# Altium PCB F407I.PcbDoc (part 1 of 2)
Units mm, origin at the board's own origin, x right, y up, seen from the top; angles counter-clockwise.
Board outline 140 x 100 mm, 2 copper layers (Top Layer, Bottom Layer); 101 components, 174 nets, 604 pads, 1189 vias.
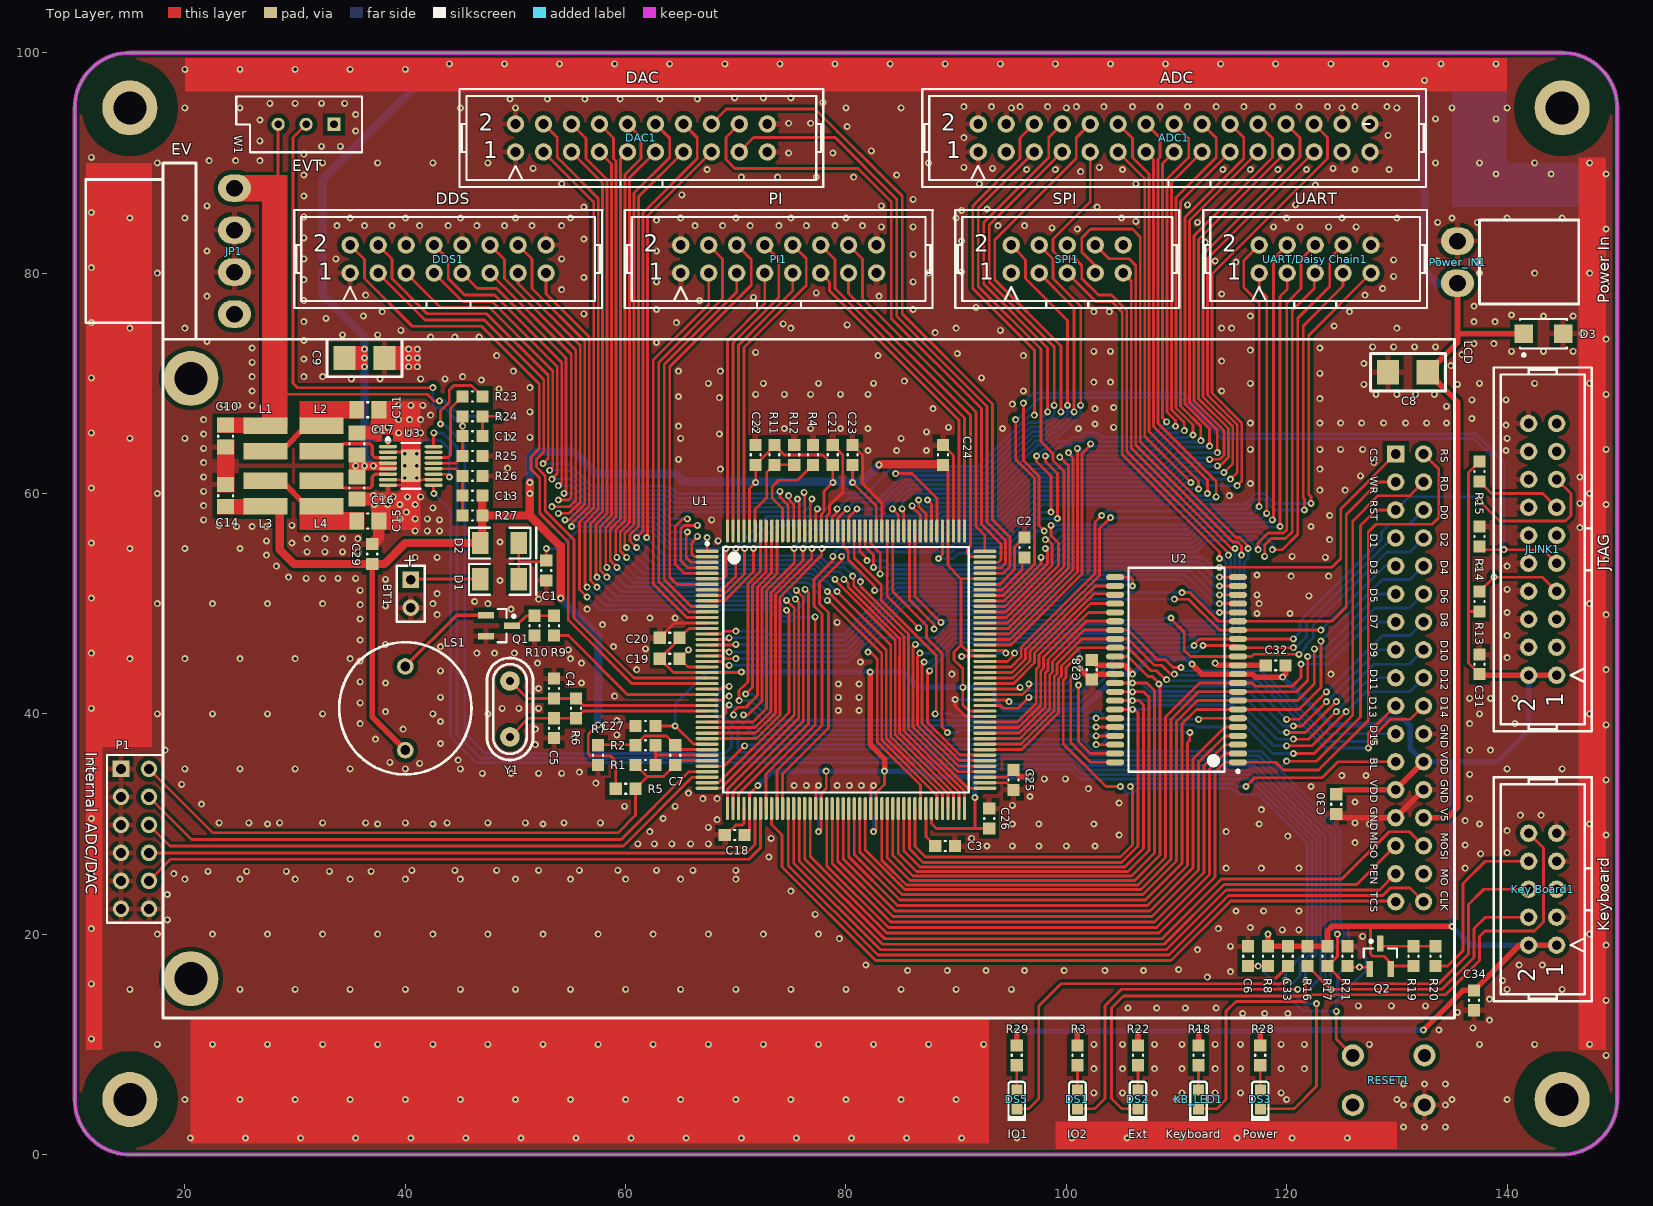
[diagram p0: Top Layer view]
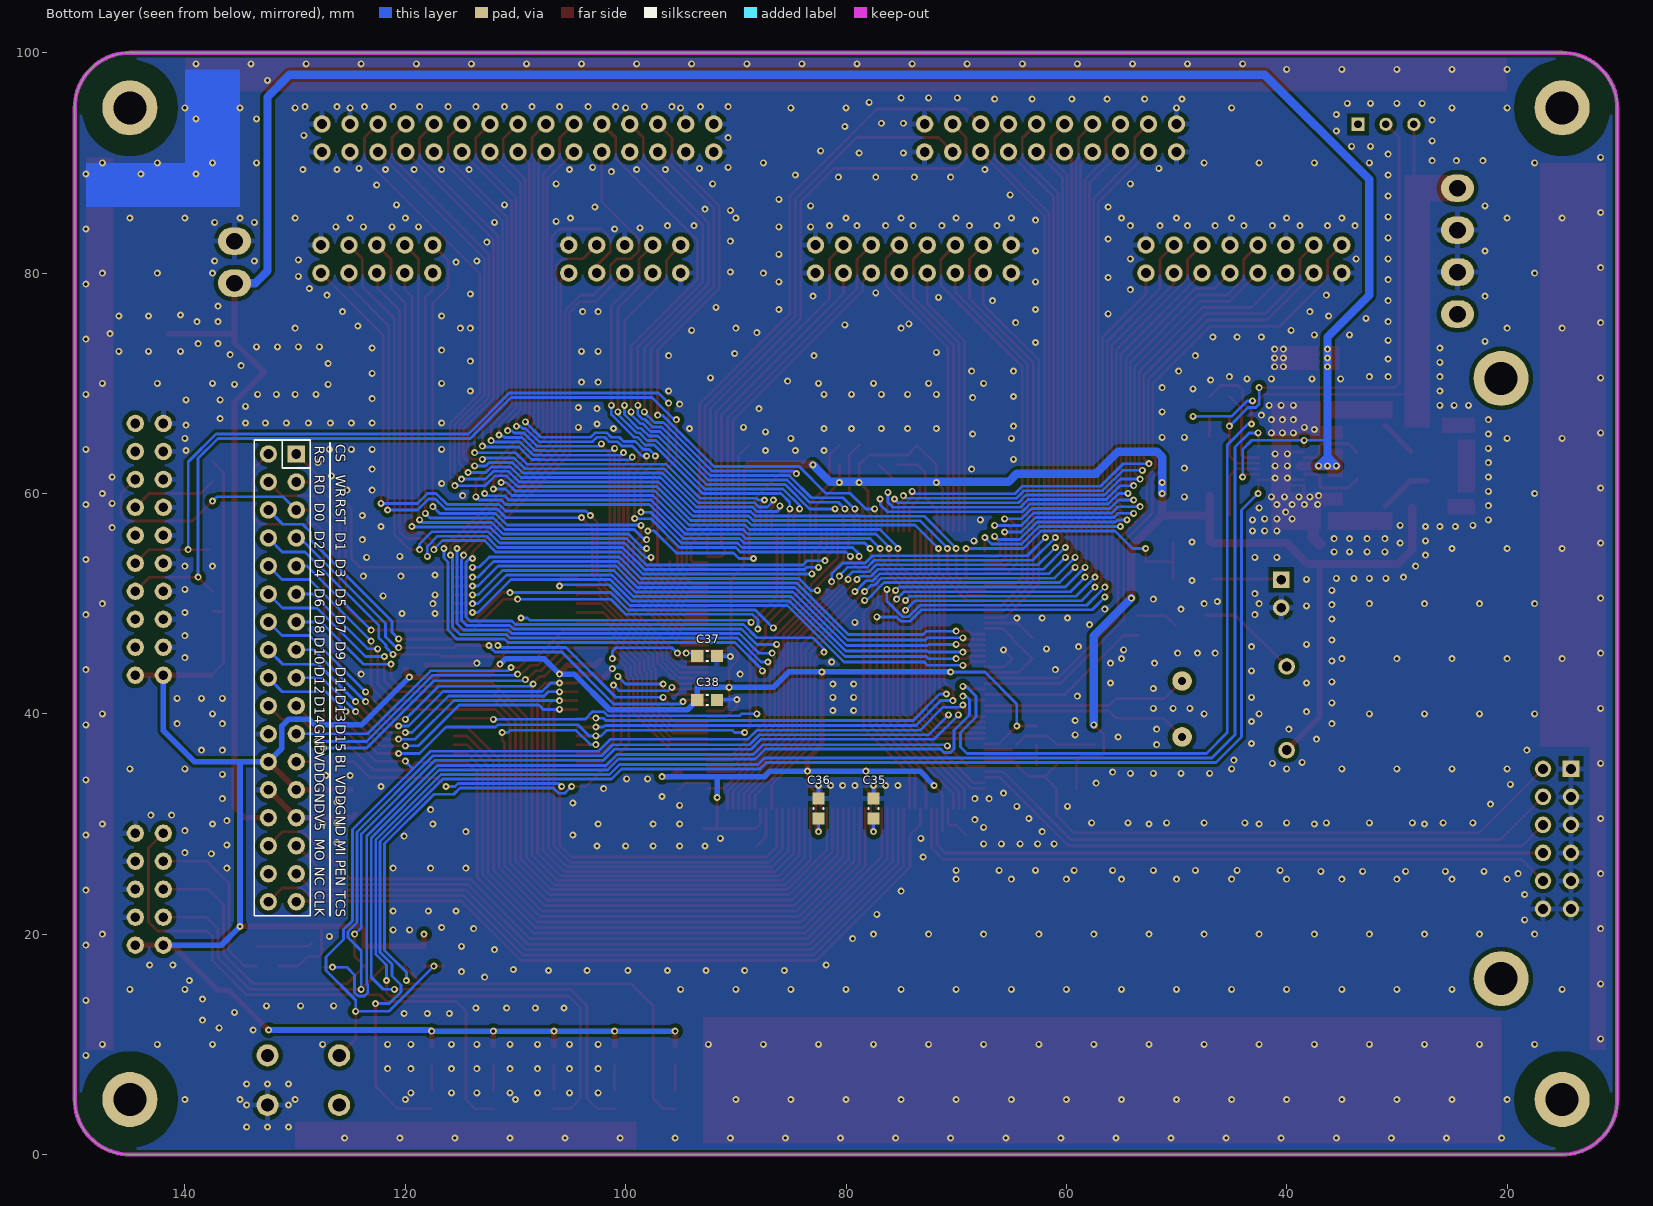
[diagram p1: Bottom Layer view, seen from below]

## Layer stack, top to bottom
Top Solder: solder mask 0.0102, Solder Resist, Dk 3.5
Top Layer: signal copper 0.0356
Dielectric 1: dielectric 0.32, FR-4, Dk 4.8
Bottom Layer: signal copper 0.0356
Bottom Solder: solder mask 0.0102, Solder Resist, Dk 3.5

## Board outline
10,5 ccw(c15,5) 15,0 145,0 ccw(c145,5) 150,5 150,95 ccw(c145,95) 145,100 15,100 ccw(c15,95) 10,95

## Design rules (kind name [scope] priority, off if disabled: settings)
Clearance [All] p1: gap=0.152 except(0.254: Track-Poly Fill-Poly; 0.381: Arc-Poly SMDPad-Poly THPad-Poly Via-Poly Poly-Poly)
HoleSize [All] p1: absolutevalues=TRUE maxlimit=2539.975 minlimit=0.305 maxpercent=80.000 minpercent=20.000
PolygonConnect PolygonConnect_1 [IsVia] p1: connectstyle=Direct reliefconductorwidth=0.254 reliefentries=4 polygonreliefangle="90 Angle" airgapwidth=0.254
PolygonConnect [All] p2: connectstyle=Relief reliefconductorwidth=0.508 reliefentries=4 polygonreliefangle="90 Angle" airgapwidth=0.381
RoutingVias [All] p1: holewidth=0.635 width=0.305 viastyle="Through Hole" minholewidth=0.305 minwidth=0.635 maxholewidth=711.2 maxwidth=1270
SilkToSilkClearance [All] p1: silktosilkclearance=0.152
SilkToSolderMaskClearance [IsPad] p1: minsilkscreentomaskgap=0.076 clearancetoexposedcopper=TRUE
SolderMaskExpansion [All] p1: expansion=0.102
Width [All] p1: maxlimit=254 minlimit=0.152 preferedwidth=0.254
27 further rules are at their usual default settings.

## Classes and differential pairs
component class PORTS: ADC1 DAC1 DDS1 JLINK1 KB_LED1 "Key Board1" PI1 Q2 R13 R14 R15 R16 R17 R18 R19 R20 R21 SPI1 "UART/Daisy Chain1"
component class Power: C8 C9 C10 C11 C12 C13 C14 C15 C16 C17 C18 C19 C20 C21 C22 C23 C24 C25 C26 C27 C28 C29 C30 C31 C32 C33 C34 C35 C36 C37 C38 D3 DS2 DS3 JP1 L1 L2 L3 L4 Power_IN1 R22 R23 R24 R25 R26 R27 R28 U3 W1
component class STM32: BT1 C1 C2 C3 C4 C5 C6 C7 D1 D2 DS1 DS5 LCD LS1 P1 Q1 R1 R2 R3 R4 R5 R6 R7 R8 R9 R10 R11 R12 R29 RESET1 U1 U2 Y1

## Components (designator, comment, footprint, x,y, rotation, side; value= is the part's Value field where it differs from the comment)
ADC1 "Header 15X2" HEADER15X2 92,91 r0 top
BT1 "3V" BAT-2 40.5,50.9 r270 top
C1 "100nF" CAPC0603(1608)55_M 52.8,53 r270 top
C2 "2.2uF" CAPC0603(1608)55_M 96.2,55.1 r270 top
C3 "2.2uF" CAPC0603(1608)55_M 89,28 r180 top
C4 "33pF" CAPC0603(1608)55_M 53.5,42.3 r90 top
C5 "33pF" CAPC0603(1608)55_M 53.5,38.7 r270 top
C6 "100nF" CAPC0603(1608)55_M 116.5,18 r90 top
C7 "100nF" CAPC0603(1608)55_M 64.5,36.25 r90 top
C8 "100uF" CAPC3225 131,71 r0 top
C9 "100uF" CAPC3225 36.3,72.3 r180 top
C10 "10uF" CAPC0805(2012)75_M 23.7,65.2 r270 top
C11 "10uF" CAPC0805(2012)75_M 36.6,67.6 r0 top
C12 "33pF" CAPC0603(1608)55_M 46.1,65.2 r0 top
C13 "33pF" CAPC0603(1608)55_M 46.1,59.8 r0 top
C14 "10uF" CAPC0805(2012)75_M 23.7,59.8 r90 top
C15 "10uF" CAPC0805(2012)75_M 36.6,57.5 r0 top
C16 "10uF" CAPC0805(2012)75_M 35.6,60.5 r90 top
C17 "10uF" CAPC0805(2012)75_M 35.6,64.5 r270 top
C18 "100nF" CAPC0603(1608)55_M 69.9,29 r0 top
C19 "100nF" CAPC0603(1608)55_M 64,45 r180 top
C20 "100nF" CAPC0603(1608)55_M 64,46.9 r0 top
C21 "100nF" CAPC0603(1608)55_M 78.8,63.5 r270 top
C22 "100nF" CAPC0603(1608)55_M 71.8,63.5 r270 top
C23 "100nF" CAPC0603(1608)55_M 80.6,63.5 r270 top
C24 "100nF" CAPC0603(1608)55_M 88.8,63.5 r270 top
C25 "100nF" CAPC0603(1608)55_M 95.2,34 r90 top
C26 "100nF" CAPC0603(1608)55_M 93,30.5 r270 top
C27 "100nF" CAPC0603(1608)55_M 61.8,38.9 r0 top
C28 "100nF" CAPC0603(1608)55_M 102.3,44 r90 top
C29 "100nF" CAPC0603(1608)55_M 37,54.5 r270 top
C30 "100nF" CAPC0603(1608)55_M 124.5,31.8 r90 top
C31 "100nF" CAPC0603(1608)55_M 137.5,44.5 r270 top
C32 "100nF" CAPC0603(1608)55_M 119,44.4 r0 top
C33 "100nF" CAPC0603(1608)55_M 120.1,18 r90 top
C34 "100nF" CAPC0603(1608)55_M 137,14 r90 top
C35 "100nF" CAPC0603(1608)55_M 77.5,31.4 r270 bottom
C36 "100nF" CAPC0603(1608)55_M 82.5,31.4 r270 bottom
C37 "100nF" CAPC0603(1608)55_M 92.6,45.25 r0 bottom
C38 "100nF" CAPC0603(1608)55_M 92.6,41.25 r0 bottom
D1 "1N4148" LL34 50.3,52.2 r270 top
D2 "1N4148" LL34 50.3,55.5 r270 top
D3 "P6KE6.8A" DO-214AC 143.3,74.5 r180 top
DAC1 "Header 10X2" HEADER10X2 50,91 r0 top
DDS1 "Header 8X2" Header8X2 35,80 r0 top
DS1 "LED-BLUE" 0603LED_BLUE_V 101,5 r90 top
DS2 "LED-BLUE" 0603LED_BLUE_V 106.5,5 r90 top
DS3 "LED-BLUE" 0603LED_BLUE_V 117.6,5 r90 top
DS5 "LED-BLUE" 0603LED_BLUE_V 95.5,5 r90 top
JLINK1 "Header 10X2" HEADER10X2 144.5,43.5 r90 top
JP1 "Header 4" 3.96-4-A 24.5,82 r270 top
KB_LED1 "LED-BLUE" 0603LED_BLUE_V 112,5 r90 top
"Key Board1" "JTAG" HEADER5X2 144.5,19 r90 top
L1 "4.7uH" CD32 27.3,65 r0 top
L2 "4.7uH" CD32 32.4,65 r0 top
L3 "4.7uH" CD32 27.3,60 r180 top
L4 "4.7uH" CD32 32.4,60 r180 top
LCD "TFT_LCD4.7" DB2*17-3.5 18,74 r270 top locked
LS1 "Speaker" Buzzer 40,40.5 r90 top
P1 "Header 6X2" HDR2X6 14.2,35 r270 top
PI1 "Header 8X2" HEADER8X2 65,80 r0 top locked
Power_IN1 "Header 2" VH3.96-2-AW 135.5,81 r270 top
Q1 "MMBT3904" SOT23_M 48.5,48 r0 top
Q2 "MMBT3906" SOT23_M 128.5,18 r90 top
R1 "0R" RESC0603(1608)_M 61.8,35.35 r0 top
R2 "Open" RESC0603(1608)_M 61.8,37.15 r0 top
R3 "1K" RESC0603(1608)_M 101,9 r90 top
R4 "10K" RESC0603(1608)_M 77,63.5 r270 top
R5 "10R" RESC0603(1608)_M 60,33.2 r180 top
R6 "1M" RESC0603(1608)_M 55.5,40.5 r90 top
R7 "0R" RESC0603(1608)_M 57.5,36.25 r90 top
R8 "10K" RESC0603(1608)_M 118.3,18 r270 top
R9 "1K" RESC0603(1608)_M 53.5,48 r270 top
R10 "10K" RESC0603(1608)_M 51.725,48 r90 top
R11 "20K" RESC0603(1608)_M 73.5,63.5 r270 top
R12 "30K" RESC0603(1608)_M 75.3,63.5 r270 top
R13 "1K" RESC0603(1608)_M 137.5,50.2 r270 top
R14 "1K" RESC0603(1608)_M 137.5,56.1 r90 top
R15 "1K" RESC0603(1608)_M 137.5,62 r90 top
R16 "10K" RESC0603(1608)_M 121.9,18 r270 top
R17 "10K" RESC0603(1608)_M 123.7,18 r270 top
R18 "1K" RESC0603(1608)_M 112,9 r270 top
R19 "10K" RESC0603(1608)_M 131.5,18 r270 top
R20 "1K" RESC0603(1608)_M 133.5,18 r270 top
R21 "10K" RESC0603(1608)_M 125.5,18 r270 top
R22 "470R" RESC0603(1608)_M 106.5,9 r270 top
R23 "1K" RESC0603(1608)_M 46.1,68.8 r180 top
R24 "680K" RESC0603(1608)_M 46.1,67 r180 top
R25 "150K" RESC0603(1608)_M 46.1,63.4 r180 top
R26 "150K" RESC0603(1608)_M 46.1,61.6 r180 top
R27 "680K" RESC0603(1608)_M 46.1,58 r180 top
R28 "470R" RESC0603(1608)_M 117.6,9 r270 top
R29 "1K" RESC0603(1608)_M 95.5,9 r90 top
RESET1 "Button" Button665 132.5,9 r180 top
SPI1 "Header 5X2" HEADER5X2 95,80 r0 top
U1 "STM32F407IxT6" LQFP176 80,44 r0 top locked
U2 "IS62WV51216BLL" TSOP-2-44 110,44 r180 top locked
U3 "LTC3607" MSE16 40.5,62.5 r0 top
"UART/Daisy Chain1" "Header 5X2" HEADER5X2 117.5,80 r0 top
W1 "1M" VR5 31,93.5 r180 top
Y1 "8MHz" HC-49S 49.5,37.9 r90 top

## Footprints (in the part's own frame and the unit in brackets; to place one, negate y for a bottom-side part, rotate by r counter-clockwise, add the part's x,y. Pads: shape width x height; smd on the part's side, far side on the other; paste and mask are expansions set on the pad)
3.96-4-A [mm]
  oval 2.5x3 hole 1.5: 1(-5.715,0) 2(-1.905,0) 3(1.905,0) 4(5.715,0)
  silkscreen extent -8,-13.5 8,-3.5, body extent -8,-14.58 8,0.4, height 8
0603LED_BLUE_V [mm] "SMT LED, 2-Leads, Body 1.6x0.8mm (0603-Size)"
  rect 1x1 smd paste+0 mask+0: 1(0.85,0) 2(-0.85,0)
  silkscreen extent -1.97,-0.85 1.6,0.85, body extent -0.92,-0.53 1.09,0.53, height 1.1
BAT-2 [mm] "Battery; 2 Leads"
  rect 1.5x1.5 hole 0.9: 1(-1.27,0)
  round 1.5 hole 0.9: 2(1.27,0)
  silkscreen extent -2.54,-1.27 2.54,1.27
Button665 [mm]
  round 2 hole 1.2: 0(0,0) 1(6.5,0) 2(0,4.5) 3(6.5,4.5)
  body extent -0.25,-0.75 6.75,5.25, height 5
Buzzer [mm]
  round 1.5 hole 0.9: 1(-3.8,0) 2(3.8,0)
  silkscreen extent -6,-6 6,6, body extent -6,-6 6,6, height 9.6
CAPC0603(1608)55_M [mm] "Chip Capacitor, Body 1.6x0.8mm, Height 0.55mm, IPC Low Density"
  rect 1.1x1.1 smd: 1(-0.9,0) 2(0.9,0)
  silkscreen extent -0.05,-0.45 0.05,0.45, body extent -0.87,-0.47 0.88,0.48, height 0.55
CAPC0805(2012)75_M [mm] "Chip Capacitor, Body 2.0x1.2mm, Height 0.75mm, IPC Low Density"
  rect 1.35x1.55 smd: 1(-1,0) 2(1,0)
  silkscreen extent -0.05,-0.67 0.05,0.67, body extent -1.1,-0.72 1.1,0.72, height 0.75
CAPC3225 [mm] "SMT Capacitor, 2 Leads, Body 3.5x2.8mm"
  rect 2x2.2 smd: 1(-1.8,0) 2(1.8,0)
  silkscreen extent -3.4,-1.7 3.4,1.7, body extent -1.6,-1.3 1.6,1.3, height 2.5
CD32 [mm]
  rect 4x1.5 smd: 1(0,1.15) 2(0,-1.15)
  body extent -1.75,-1.75 1.75,1.75, height 2.1
DB2*17-3.5 [mil]
  round 196.85 hole 118.11: 0(140.16,100) 0(2284.84,100)
  rect 62x62 hole 35: 1(410,4405)
  round 62 hole 35: 2(410,4505) 3(510,4405) 4(510,4505) 5(610,4405) 6(610,4505) 7(710,4405) 8(710,4505) 9(810,4405) 10(810,4505) 11(910,4405) 12(910,4505) 13(1010,4405) 14(1010,4505) 15(1110,4405) 16(1110,4505) 17(1210,4405) 18(1210,4505) 19(1310,4405) 20(1310,4505) 21(1410,4405) 22(1410,4505) 23(1510,4405) 24(1510,4505) 25(1610,4405) 26(1610,4505) 27(1710,4405) 28(1710,4505) 29(1810,4405) 30(1810,4505) 31(1910,4405) 32(1910,4505) 33(2010,4405) 34(2010,4505)
  silkscreen extent 0,0 2425,4615, body extent -5,-5 2430,4620, height 472
DO-214AC [mm] "SMA, 2-Leads, Body 4.245x2.665mm, Height 2.29mm"
  rect 1.7x1.68 smd: 1(-1.79,0) 2(1.79,0)
  silkscreen extent -2.12,-1.33 2.12,2.06, body extent -2.57,-1.33 2.57,1.33, height 2.29
HC-49S [mil]
  round 70 hole 30: 1(0,0) 2(200,0)
  silkscreen extent -82,-82 282,82, body extent -83,-82 282,82, height 118
HDR2X6 [mm] "Connector; Header; 6x2 Position"
  rect 1.5x1.5 hole 0.9: 1(0,0)
  round 1.5 hole 0.9: 2(0,2.54) 3(2.54,0) 4(2.54,2.54) 5(5.08,0) 6(5.08,2.54) 7(7.62,0) 8(7.62,2.54) 9(10.16,0) 10(10.16,2.54) 11(12.7,0) 12(12.7,2.54)
  silkscreen extent -1.27,-1.27 13.97,3.81
HEADER5X2 [mil]
  round 62 hole 35: 1(0,0) 2(0,100) 3(100,0) 4(100,100) 5(200,0) 6(200,100) 7(300,0) 8(300,100) 9(400,0) 10(400,100)
  silkscreen extent -200,-125 600,225
Header8X2 [mil]
  round 62 hole 35: 1(0,0) 2(0,100) 3(100,0) 4(100,100) 5(200,0) 6(200,100) 7(300,0) 8(300,100) 9(400,0) 10(400,100) 11(500,0) 12(500,100) 13(600,0) 14(600,100) 15(700,0) 16(700,100)
  silkscreen extent -200,-125 902,225
HEADER8X2 [mil]
  round 62 hole 35: 1(0,0) 2(0,100) 3(100,0) 4(100,100) 5(200,0) 6(200,100) 7(300,0) 8(300,100) 9(400,0) 10(400,100) 11(500,0) 12(500,100) 13(600,0) 14(600,100) 15(700,0) 16(700,100)
  silkscreen extent -200,-125 902,225
HEADER10X2 [mil]
  round 62 hole 35: 1(0,0) 2(0,100) 3(100,0) 4(100,100) 5(200,0) 6(200,100) 7(300,0) 8(300,100) 9(400,0) 10(400,100) 11(500,0) 12(500,100) 13(600,0) 14(600,100) 15(700,0) 16(700,100) 17(800,0) 18(800,100) 19(900,0) 20(900,100)
  silkscreen extent -200,-125 1100,225
HEADER15X2 [mil]
  round 62 hole 35: 1(0,0) 2(0,100) 3(100,0) 4(100,100) 5(200,0) 6(200,100) 7(300,0) 8(300,100) 9(400,0) 10(400,100) 11(500,0) 12(500,100) 13(600,0) 14(600,100) 15(700,0) 16(700,100) 17(800,0) 18(800,100) 19(900,0) 20(900,100) 21(1000,0) 22(1000,100) 23(1100,0) 24(1100,100) 25(1200,0) 26(1200,100) 27(1300,0) 28(1300,100) 29(1400,0) 30(1400,100)
  silkscreen extent -200,-125 1600,225
LL34 [mil]
  rect 80x60 smd: 1(0,-137.8) 2(0,0)
  silkscreen extent -55,-178 55,62
LQFP176 [mm] "Thin QFP, 176-Leads, Body 24x24mm, Pitch 0.5mm, IPC Low Density"
  oval 2.1x0.3 smd: 1(-12.6,10.75) 2(-12.6,10.25) 3(-12.6,9.75) 4(-12.6,9.25) 5(-12.6,8.75) 6(-12.6,8.25) 7(-12.6,7.75) 8(-12.6,7.25) 9(-12.6,6.75) 10(-12.6,6.25) 11(-12.6,5.75) 12(-12.6,5.25) 13(-12.6,4.75) 14(-12.6,4.25) 15(-12.6,3.75) 16(-12.6,3.25) 17(-12.6,2.75) 18(-12.6,2.25) 19(-12.6,1.75) 20(-12.6,1.25) 21(-12.6,0.75) 22(-12.6,0.25) 23(-12.6,-0.25) 24(-12.6,-0.75) 25(-12.6,-1.25) 26(-12.6,-1.75) 27(-12.6,-2.25) 28(-12.6,-2.75) 29(-12.6,-3.25) 30(-12.6,-3.75) 31(-12.6,-4.25) 32(-12.6,-4.75) 33(-12.6,-5.25) 34(-12.6,-5.75) 35(-12.6,-6.25) 36(-12.6,-6.75) 37(-12.6,-7.25) 38(-12.6,-7.75) 39(-12.6,-8.25) 40(-12.6,-8.75) 41(-12.6,-9.25) 42(-12.6,-9.75) 43(-12.6,-10.25) 44(-12.6,-10.75) 89(12.6,-10.75) 90(12.6,-10.25) 91(12.6,-9.75) 92(12.6,-9.25) 93(12.6,-8.75) 94(12.6,-8.25) 95(12.6,-7.75) 96(12.6,-7.25) 97(12.6,-6.75) 98(12.6,-6.25) 99(12.6,-5.75) 100(12.6,-5.25) 101(12.6,-4.75) 102(12.6,-4.25) 103(12.6,-3.75) 104(12.6,-3.25) 105(12.6,-2.75) 106(12.6,-2.25) 107(12.6,-1.75) 108(12.6,-1.25) 109(12.6,-0.75) 110(12.6,-0.25) 111(12.6,0.25) 112(12.6,0.75) 113(12.6,1.25) 114(12.6,1.75) 115(12.6,2.25) 116(12.6,2.75) 117(12.6,3.25) 118(12.6,3.75) 119(12.6,4.25) 120(12.6,4.75) 121(12.6,5.25) 122(12.6,5.75) 123(12.6,6.25) 124(12.6,6.75) 125(12.6,7.25) 126(12.6,7.75) 127(12.6,8.25) 128(12.6,8.75) 129(12.6,9.25) 130(12.6,9.75) 131(12.6,10.25) 132(12.6,10.75)
  oval 0.3x2.1 smd: 45(-10.75,-12.6) 46(-10.25,-12.6) 47(-9.75,-12.6) 48(-9.25,-12.6) 49(-8.75,-12.6) 50(-8.25,-12.6) 51(-7.75,-12.6) 52(-7.25,-12.6) 53(-6.75,-12.6) 54(-6.25,-12.6) 55(-5.75,-12.6) 56(-5.25,-12.6) 57(-4.75,-12.6) 58(-4.25,-12.6) 59(-3.75,-12.6) 60(-3.25,-12.6) 61(-2.75,-12.6) 62(-2.25,-12.6) 63(-1.75,-12.6) 64(-1.25,-12.6) 65(-0.75,-12.6) 66(-0.25,-12.6) 67(0.25,-12.6) 68(0.75,-12.6) 69(1.25,-12.6) 70(1.75,-12.6) 71(2.25,-12.6) 72(2.75,-12.6) 73(3.25,-12.6) 74(3.75,-12.6) 75(4.25,-12.6) 76(4.75,-12.6) 77(5.25,-12.6) 78(5.75,-12.6) 79(6.25,-12.6) 80(6.75,-12.6) 81(7.25,-12.6) 82(7.75,-12.6) 83(8.25,-12.6) 84(8.75,-12.6) 85(9.25,-12.6) 86(9.75,-12.6) 87(10.25,-12.6) 88(10.75,-12.6) 133(10.75,12.6) 134(10.25,12.6) 135(9.75,12.6) 136(9.25,12.6) 137(8.75,12.6) 138(8.25,12.6) 139(7.75,12.6) 140(7.25,12.6) 141(6.75,12.6) 142(6.25,12.6) 143(5.75,12.6) 144(5.25,12.6) 145(4.75,12.6) 146(4.25,12.6) 147(3.75,12.6) 148(3.25,12.6) 149(2.75,12.6) 150(2.25,12.6) 151(1.75,12.6) 152(1.25,12.6) 153(0.75,12.6) 154(0.25,12.6) 155(-0.25,12.6) 156(-0.75,12.6) 157(-1.25,12.6) 158(-1.75,12.6) 159(-2.25,12.6) 160(-2.75,12.6) 161(-3.25,12.6) 162(-3.75,12.6) 163(-4.25,12.6) 164(-4.75,12.6) 165(-5.25,12.6) 166(-5.75,12.6) 167(-6.25,12.6) 168(-6.75,12.6) 169(-7.25,12.6) 170(-7.75,12.6) 171(-8.25,12.6) 172(-8.75,12.6) 173(-9.25,12.6) 174(-9.75,12.6) 175(-10.25,12.6) 176(-10.75,12.6)
  silkscreen extent -12.72,-11.15 11.15,11.57, body extent -12,-12 12,12, height 1.6
MSE16 [mm] "SOP, 16-Leads, Body 4.1x3.1mm, Pitch 0.5mm, Thermal Pad 2.95x1.76mm, IPC Medium Density"
  oval 1.65x0.3 smd: 1(-2.075,1.75) 2(-2.075,1.25) 3(-2.075,0.75) 4(-2.075,0.25) 5(-2.075,-0.25) 6(-2.075,-0.75) 7(-2.075,-1.25) 8(-2.075,-1.75) 9(2.075,-1.75) 10(2.075,-1.25) 11(2.075,-0.75) 12(2.075,-0.25) 13(2.075,0.25) 14(2.075,0.75) 15(2.075,1.25) 16(2.075,1.75)
  rect 1.76x2.95 smd: 17(0,0)
  silkscreen extent -2.2,-2.08 0.85,2.57, body extent -1.55,-2.05 1.55,2.05, height 1.1
RESC0603(1608)_M [mm] "Chip Resistor, Body 1.6x0.8mm, IPC Low Density"
  rect 1.1x1.1 smd: 1(-0.9,0) 2(0.9,0)
  silkscreen extent -0.05,-0.45 0.05,0.45, body extent -0.85,-0.47 0.85,0.47, height 0.6
SOT23_M [mm] "SOT23, 3-Leads, Body 2.9x1.3mm, Pitch 0.95mm, Lead Span 2.3mm - Reverse Pinning, IPC Low Density"
  rect 1.45x0.6 smd: 1(1.175,0) 2(-1.175,-0.95) 3(-1.175,0.95)
  silkscreen extent -0.1,-1.5 1.48,1.5, body extent -0.7,-1.5 0.7,1.5, height 1.1
TSOP-2-44 [mm] "SOP, 44-Leads, Body 18.5x10.3mm, Pitch 0.8mm, IPC Medium Density"
  oval 1.65x0.55 smd: 1(-5.575,8.4) 2(-5.575,7.6) 3(-5.575,6.8) 4(-5.575,6) 5(-5.575,5.2) 6(-5.575,4.4) 7(-5.575,3.6) 8(-5.575,2.8) 9(-5.575,2) 10(-5.575,1.2) 11(-5.575,0.4) 12(-5.575,-0.4) 13(-5.575,-1.2) 14(-5.575,-2) 15(-5.575,-2.8) 16(-5.575,-3.6) 17(-5.575,-4.4) 18(-5.575,-5.2) 19(-5.575,-6) 20(-5.575,-6.8) 21(-5.575,-7.6) 22(-5.575,-8.4) 23(5.575,-8.4) 24(5.575,-7.6) 25(5.575,-6.8) 26(5.575,-6) 27(5.575,-5.2) 28(5.575,-4.4) 29(5.575,-3.6) 30(5.575,-2.8) 31(5.575,-2) 32(5.575,-1.2) 33(5.575,-0.4) 34(5.575,0.4) 35(5.575,1.2) 36(5.575,2) 37(5.575,2.8) 38(5.575,3.6) 39(5.575,4.4) 40(5.575,5.2) 41(5.575,6) 42(5.575,6.8) 43(5.575,7.6) 44(5.575,8.4)
  silkscreen extent -5.7,-9.25 4.35,9.35, body extent -5.15,-9.25 5.15,9.25, height 1.2
VH3.96-2-AW [mm]
  oval 2.5x3 hole 1.5: 1(-1.905,0) 2(1.905,0)
  silkscreen extent -3.81,2 3.81,11, body extent -3.8,-0.4 3.8,11, height 9
VR5 [mm]
  rect 1.2x1.2 hole 0.7: 1(-2.54,0)
  round 1.2 hole 0.7: 2(0,0) 3(2.54,0)
  silkscreen extent -5.08,-2.54 6.35,2.54

## Part data
ADC1: "Header, 15-Pin, Dual row"
BT1: library part Battery, "Multicell Battery"
C1 C2 C3 C4 C5 C6 C7 C8 C9 C10 C11 C12 C13 C14 C15 C16 C17 C18 C19 C20 C21 C22 C23 C24 C25 C26 C27 C28 C29 C30 C31 C32 C33 C34 C35 C36 C37 C38: library part CAP
D1 D2 D3: library part Diode
DAC1 JLINK1: "Header, 10-Pin, Dual row"
DDS1 PI1: "Header, 8-Pin, Dual row"
JP1: "Header, 4-Pin"
"Key Board1": library part "Header 5X2", "Header, 5-Pin, Dual row"
L1 L2 L3 L4: library part Inductor
LS1: "Loudspeaker"
P1: "Header, 6-Pin, Dual row"
Power_IN1: "Header, 2-Pin"
Q1: "NPN General Purpose Amplifier"
Q2: "PNP General Purpose Amplifier"
R1 R2 R3 R4 R5 R6 R7 R8 R9 R10 R11 R12 R13 R14 R15 R16 R17 R18 R19 R20 R21 R22 R23 R24 R25 R26 R27 R28 R29: library part RES
SPI1 "UART/Daisy Chain1": "Header, 5-Pin, Dual row"
W1: library part RPot2, "Potentiometer"
Y1: library part XTAL, "Crystal Oscillator"

## Free pads (board coordinates)
  round 5 hole 3: 0(15,95) 1(15,5) 2(145,5) 3(145,95)

## Via types
v1: diameter 0.635, hole 0.305, Top Layer to Bottom Layer, tented both sides, 1189 vias

## Nets (pads, with @x,y where several pads share a name; then routed paths per layer and width w, separated by ;. In a path a pad name is that pad's centre, name@x,y a point inside that pad or via, vN(x,y) a via of type N, cw(c..) or ccw(c..) an arc to the next point about the centre after c; other vN are vias at no path point)
+5V: C8.2 C9.2 C16.2 C17.2 D3.2 LCD.28 Power_IN1.2 U3.1 U3.4 U3.5 U3.11 | length 226.6
  Top Layer w0.254: U3.1@38.425,64.25 v1(38.425,64.825) ; U3.11@42.575,61.75 43.75,61.75 v1(44,61.5)
  Top Layer w0.508: LCD.28@132.427,30.566 134.566,30.566 135.5,31.5 135.5,68.3 C8.2@132.8,71 135.5,73.7 135.5,74.5 ; Power_IN1.2@135.5,79.095 135.5,74.5 ; D3.2@141.51,74.5 135.5,74.5
  Bottom Layer w0.254: 36.325,64.825 v1(38.425,64.825) 43.175,64.825 44,64 v1(44,61.5)
  Bottom Layer w0.762: Power_IN1.2@135.5,79.095 133.605,79.095 132.5,80.2 132.5,96 130.5,98 42,98 32.5,88.5 32.5,78 36.3,74.2 v1(36.3,73.1) v1(36.3,71.5) 36.3,63.3 ; 36.3,63.3 v1(35.5,62.5) v1(36.3,62.5) v1(37.1,62.5) 36.3,63.3
  other v1: 36.3,72.3
ADC_CONVST: ADC1.5 U1.119 | length 52.3
  Top Layer w0.254: U1.119@92.6,48.25 94.651,48.25 99.781,53.38 99.781,62.019 98.8,63 98.8,63.6 97.7,64.7 97.7,73.1 92,78.8 92,85.92 ADC1.5@97.08,91
BOOT0: R4.2 U1.166 | length 8.9
  Top Layer w0.254: U1.166@74.25,56.6 74.25,58.65 73.3,59.6 73.3,60.6 73.9,61.2 75.6,61.2 R4.2@77,62.6
DAC0: DAC1.5 U1.43 | length 78.9
  Top Layer w0.254: DAC1.5@55.08,91 57.913,88.167 57.913,58.363 56.803,57.254 56.803,52.097 v1(57.4,51.5) ; U1.43@67.4,33.75 68.45,33.75 74.825,40.125 74.825,49.175 v1(74.6,49.4)
  Bottom Layer w0.254: v1(57.4,51.5) 58.638,50.262 73.738,50.262 v1(74.6,49.4)
DAC1: DAC1.6 U1.44 | length 82.4
  Top Layer w0.254: DAC1.6@55.08,93.54 56.4,92.22 56.4,90.4 58.319,88.481 58.319,58.195 57.297,57.172 57.297,52.503 v1(57.4,52.4) ; U1.44@67.4,33.25 68.65,33.25 75.3,39.9 75.3,49.6 v1(74.6,50.3)
  Bottom Layer w0.254: v1(57.4,52.4) 59.132,50.668 74.232,50.668 v1(74.6,50.3)
DAC2: DAC1.7 U1.45 | length 79.5
  Top Layer w0.254: DAC1.7@57.62,91 58.726,89.894 58.726,58.027 57.703,57.004 57.703,52.997 v1(58.3,52.4) ; U1.45@69.25,31.4 69.25,33.15 75.706,39.606 75.706,50.106 75.413,50.4 v1(75.4,50.4)
  Bottom Layer w0.254: v1(58.3,52.4) 59.626,51.074 74.725,51.074 v1(75.4,50.4)
DAC3: DAC1.8 U1.46 | length 82.1
  Top Layer w0.254: DAC1.8@57.62,93.54 58.9,92.26 58.9,90.4 59.132,90.168 59.132,57.858 58.197,56.923 58.197,53.403 v1(58.3,53.3) ; U1.46@69.75,31.4 69.75,32.95 76.113,39.313 76.113,50.587 v1(75.5,51.2)
  Bottom Layer w0.254: v1(58.3,53.3) 60.1,51.5 75.2,51.5 v1(75.5,51.2)
DAC4: DAC1.9 U1.83 | length 81.7
  Top Layer w0.254: v1@59.213,53.3 58.603,53.91 58.603,56.755 59.538,57.69 59.538,90.378 DAC1.9@60.16,91 ; v1@78.45,50.25 83.242,45.458 83.242,37.609 88.25,32.602 U1.83@88.25,31.4
  Bottom Layer w0.254: v1(59.2,53.3) 59.213,53.3 60.606,51.906 76.538,51.906 78.144,50.3 v1@78.2,50.3
  other v1: 78.3,50.3
DAC5: DAC1.10 U1.84 | length 85.3
  Top Layer w0.254: v1(59.2,54.2) 59.097,54.303 59.097,56.674 59.945,57.522 59.945,88.945 61.4,90.4 61.4,92.3 DAC1.10@60.16,93.54 ; v1@78.254,51.054 78.391,51.054 83.652,45.792 83.652,45.65 83.649,45.647 83.649,37.778 88.75,32.676 U1.84@88.75,31.4
  Bottom Layer w0.254: v1(59.2,54.2) 61.087,52.313 76.762,52.313 77.407,51.668 77.732,51.668 v1(78.3,51.1)
DAC6: DAC1.11 U1.85 | length 82.6
  Top Layer w0.254: v1(60.1,54.2) 59.503,54.797 59.503,56.505 60.351,57.353 60.351,88.651 DAC1.11@62.7,91 ; v1(79.2,51.1) 84.058,46.242 84.058,45.481 84.055,45.478 84.055,37.946 89.25,32.751 U1.85@89.25,31.4
  Bottom Layer w0.254: v1(60.1,54.2) 61.581,52.719 76.93,52.719 77.575,52.074 78.17,52.074 v1@79.172,51.072
DAC7: DAC1.12 U1.86 | length 86.1
  Top Layer w0.254: v1@60.113,55.1 59.913,55.3 59.913,56.34 60.758,57.185 60.758,87.258 64,90.5 64,92.24 DAC1.12@62.7,93.54 ; v1@79,52.144 84.465,46.68 84.465,45.313 84.462,45.31 84.462,38.114 89.75,32.826 U1.86@89.75,31.4
  Bottom Layer w0.254: v1(60.1,55.1) 60.113,55.1 62.087,53.126 77.099,53.126 77.743,52.481 78.719,52.481 v1(79,52.2)
DAC8: DAC1.13 U1.87 | length 83.5
  Top Layer w0.254: v1(61,55.1) 60.4,55.7 60.4,56.253 61.164,57.017 61.164,86.924 DAC1.13@65.24,91 ; v1(79.8,52.2) 79.8,52.238 80.2,51.838 80.2,51.519 84.871,46.848 84.871,45.145 84.868,45.142 84.868,38.283 90.25,32.901 U1.87@90.25,31.4
  Bottom Layer w0.254: v1(61,55.1) 62.568,53.532 77.267,53.532 77.912,52.887 79.413,52.887 79.8,52.5 v1(79.8,52.2)
DAC9: DAC1.14 U1.88 | length 86.8
  Top Layer w0.254: v1(61,56) 61.57,56.57 61.57,85.47 66.5,90.4 66.5,92.28 DAC1.14@65.24,93.54 ; v1(80.6,52.5) 80.652,52.5 80.7,52.452 80.7,51.594 85.278,47.016 85.278,44.976 85.274,44.973 85.274,38.451 90.75,32.975 U1.88@90.75,31.4
  Bottom Layer w0.254: v1(61,56) 63.062,53.938 77.435,53.938 78.08,53.294 79.858,53.294 80.6,52.552 v1(80.6,52.5)
DAC10: DAC1.15 U1.89 | length 83.3
  Top Layer w0.254: v1(61.9,56) 61.977,56.077 61.977,85.197 DAC1.15@67.78,91 ; v1(81.3,52) 81.3,51.581 84.797,48.084 85.384,47.497 85.403,47.497 85.684,47.216 85.684,44.808 85.681,44.805 85.681,38.619 91.05,33.25 U1.89@92.6,33.25
  Bottom Layer w0.254: v1(61.9,56) 63.555,54.345 77.604,54.345 78.248,53.7 80.3,53.7 81.3,52.7 v1(81.3,52)
DAC11: DAC1.16 U1.128 | length 61.4
  Top Layer w0.254: DAC1.16@67.78,93.54 69.14,94.9 77.2,94.9 85.1,87 85.1,76.314 93.3,68.114 93.3,57.614 94.894,56.021 94.894,53.379 94.264,52.75 U1.128@92.6,52.75
DAC12: DAC1.17 U1.129 | length 56.3
  Top Layer w0.254: DAC1.17@70.32,91 71.62,92.3 79.02,92.3 84.6,86.72 84.6,76.107 92.8,67.907 92.8,57.407 94.487,55.72 94.487,53.68 94.057,53.25 U1.129@92.6,53.25
DAC13: DAC1.18 U1.130 | length 58.5
  Top Layer w0.254: DAC1.18@70.32,93.54 69.1,92.32 69.1,90.3 69.9,89.5 81.1,89.5 84.1,86.5 84.1,75.9 92.3,67.7 92.3,57.2 94.081,55.419 94.081,53.981 93.85,53.75 U1.130@92.6,53.75
DDS_CS: DDS1.8 U1.162 | length 56.1
  Top Layer w0.254: DDS1.8@42.62,82.54 43.9,81.26 43.9,79.5 45.4,78 48.1,78 54.194,71.906 54.194,60.994 v1(53.9,60.7) ; v1(76.2,60.1) 76.25,60.05 U1.162@76.25,56.6
  Bottom Layer w0.254: v1(53.9,60.7) 55.118,60.7 56.376,59.442 63.481,59.442 64.172,58.751 75.751,58.751 76.2,59.2 v1(76.2,60.1)
DDS_P0: DDS1.2 U1.25 | length 61.5
  Top Layer w0.254: DDS1.2@35,82.54 36.3,81.24 36.3,79.5 40.628,75.172 46.928,75.172 52.162,69.938 52.162,64.069 51.4,63.307 51.4,62.2 52.2,61.4 52.2,58.2 54.8,55.6 54.8,48.5 60.55,42.75 U1.25@67.4,42.75
DDS_P1: DDS1.3 U1.24 | length 56.7
  Top Layer w0.254: DDS1.3@37.54,80 41.803,75.737 47.163,75.737 52.568,70.332 52.568,63.768 51.9,63.1 51.9,62.4 52.7,61.6 52.7,58.4 55.3,55.8 55.3,48.7 60.75,43.25 U1.24@67.4,43.25
DDS_P2: DDS1.4 U1.165 | length 56.2
  Top Layer w0.254: DDS1.4@37.54,82.54 38.8,81.28 38.8,79.5 41.997,76.303 47.397,76.303 52.974,70.726 52.974,63.174 v1(52.5,62.7) ; v1(74,60.2) 74,59.681 74.75,58.931 U1.165@74.75,56.6
  Bottom Layer w0.254: v1(52.5,62.7) 54.842,62.7 56.881,60.661 63.986,60.661 64.677,59.97 73.77,59.97 v1(74,60.2)
DDS_P3: DDS1.5 U1.164 | length 52.3
  Top Layer w0.254: DDS1.5@40.08,80 43.211,76.869 47.631,76.869 53.381,71.119 53.381,62.381 v1(53.1,62.1) ; v1(74.8,59.8) 74.8,59.456 75.25,59.006 U1.164@75.25,56.6
  Bottom Layer w0.254: v1(53.1,62.1) 54.867,62.1 56.713,60.254 63.818,60.254 64.509,59.564 74.564,59.564 v1(74.8,59.8)
DDS_RESET: DDS1.15 U1.1 | length 39.7
  Top Layer w0.254: DDS1.15@52.78,80 52.78,78.12 56.694,74.206 56.694,58.868 55.1,57.275 v1(55.1,57) ; U1.1@67.4,54.75 v1(67.4,56)
  Bottom Layer w0.254: v1(55.1,57) 55.2,57 55.203,57.003 62.471,57.003 64.068,55.406 66.806,55.406 v1(67.4,56)
DDS_SCLK: DDS1.9 U1.161 | length 51.9
  Top Layer w0.254: DDS1.9@45.16,80 46.56,78.6 48.3,78.6 54.6,72.3 54.6,60.2 v1(54.407,60.007) ; U1.161@76.75,56.6 76.75,59.35 v1(76.9,59.5)
  Bottom Layer w0.254: v1(54.407,60.007) 54.414,60 55.243,60 56.208,59.035 63.313,59.035 64.004,58.345 76.245,58.345 76.9,59 v1(76.9,59.5)
DDS_SDIO0: DDS1.12 U1.4 | length 49.9
  Top Layer w0.254: DDS1.12@47.7,82.54 49,81.24 49,79.5 55.474,73.026 55.474,59.373 54.901,58.8 v1(53.3,58.8) ; v1(66.5,57.1) 65.3,57.1 65,56.8 65,53.9 65.65,53.25 U1.4@67.4,53.25
  Bottom Layer w0.254: v1(53.3,58.8) 55.294,58.8 55.871,58.222 62.976,58.222 64.099,57.1 v1(66.5,57.1)
DDS_SDIO1: DDS1.11 U1.5 | length 45.1
  Top Layer w0.254: DDS1.11@47.7,80 55.068,72.632 55.068,59.668 54.8,59.4 v1(53.9,59.4) ; v1(65.6,57.7) 65.2,57.7 64.494,56.994 64.494,53.606 65.35,52.75 U1.5@67.4,52.75
  Bottom Layer w0.254: v1(53.9,59.4) 55.268,59.4 56.039,58.629 63.145,58.629 64.074,57.7 v1(65.6,57.7)
DDS_SDIO2: DDS1.14 U1.2 | length 44.6
  Top Layer w0.254: DDS1.14@50.24,82.54 51.5,81.28 51.5,78.6 56.287,73.813 56.287,59.037 54.851,57.6 v1(54.5,57.6) ; v1(66.5,56.1) 66.5,56 66,55.5 66,54.5 66.25,54.25 U1.2@67.4,54.25
  Bottom Layer w0.254: v1(54.5,57.6) 55.1,57.6 55.103,57.597 55.347,57.597 55.534,57.41 62.64,57.41 64.237,55.813 66.213,55.813 v1(66.5,56.1)
DDS_SDIO3: DDS1.13 U1.3 | length 42.4
  Top Layer w0.254: DDS1.13@50.24,80 50.24,79.06 55.881,73.419 55.881,59.205 54.876,58.2 v1(53.9,58.2) ; v1(65.6,56.5) 65.6,56.3 65.5,56.2 65.5,54.2 65.95,53.75 U1.3@67.4,53.75
  Bottom Layer w0.254: v1(53.9,58.2) 53.903,58.197 55.322,58.197 55.703,57.816 62.808,57.816 64.124,56.5 v1(65.6,56.5)
DDS_UP: DDS1.7 U1.163 | length 51.4
  Top Layer w0.254: DDS1.7@42.62,80 45.186,77.434 47.866,77.434 53.787,71.513 53.787,61.787 v1(53.3,61.3) ; v1(75.6,59.5) 75.7,59.5 75.75,59.45 U1.163@75.75,56.6
  Bottom Layer w0.254: v1(53.3,61.3) 55.093,61.3 56.544,59.848 63.65,59.848 64.34,59.158 75.258,59.158 v1(75.6,59.5)
FSMC_A0: U1.16 U2.22 | length 51.7
  Top Layer w0.254: U1.16@67.4,47.25 68.65,47.25 68.9,47.5 v1(70,47.5) ; v1(113.9,52.4) U2.22@115.575,52.4
  Bottom Layer w0.254: v1(70,47.5) 72.7,47.5 73,47.2 79.8,47.2 84.474,51.874 98.773,51.874 100.721,53.822 111.978,53.822 113.4,52.4 v1(113.9,52.4)
FSMC_A1: U1.17 U2.21 | length 51.9
  Top Layer w0.254: U1.17@67.4,46.75 69.25,46.75 v1(69.4,46.9) ; v1(113.9,51.6) U2.21@115.575,51.6
  Bottom Layer w0.254: v1(69.4,46.9) 72.6,46.9 72.8,46.7 79.875,46.7 84.643,51.468 98.942,51.468 100.89,53.416 111.584,53.416 113.4,51.6 v1(113.9,51.6)
FSMC_A2: U1.18 U2.20 | length 52
  Top Layer w0.254: U1.18@67.4,46.25 69.95,46.25 v1(70,46.3) ; v1(113.9,50.8) U2.20@115.575,50.8
  Bottom Layer w0.254: v1(70,46.3) 72.5,46.3 72.6,46.2 79.949,46.2 84.811,51.062 99.11,51.062 101.058,53.01 111.19,53.01 113.4,50.8 v1(113.9,50.8)
FSMC_A3: U1.19 U2.19 | length 52.2
  Top Layer w0.254: U1.19@67.4,45.75 69.25,45.75 v1(69.4,45.6) ; v1(113.9,50) U2.19@115.575,50
  Bottom Layer w0.254: v1(69.4,45.6) 72.5,45.6 72.6,45.7 80.024,45.7 84.979,50.655 99.278,50.655 101.226,52.603 110.797,52.603 113.4,50 v1(113.9,50)
FSMC_A4: U1.20 U2.18 | length 52.5
  Top Layer w0.254: U1.20@67.4,45.25 68.85,45.25 69.1,45 v1(70,45) ; v1(113.9,49.2) U2.18@115.575,49.2
  Bottom Layer w0.254: v1(70,45) 72.506,45 72.706,45.2 80.099,45.2 85.148,50.249 99.447,50.249 101.395,52.197 110.403,52.197 113.4,49.2 v1(113.9,49.2)
FSMC_A5: U1.21 U2.23 | length 44.1
  Top Layer w0.254: U1.21@67.4,44.75 68.65,44.75 69,44.4 v1(69.4,44.4) ; U2.23@104.425,52.4 105.8,52.4 106,52.2 v1(106,51.6)
  Bottom Layer w0.254: v1(69.4,44.4) 72.6,44.4 72.9,44.7 80.174,44.7 85.316,49.842 99.615,49.842 101.482,51.71 105.89,51.71 v1(106,51.6)
FSMC_A6: LCD.2 U1.60 U2.1 | length 102.4
  Top Layer w0.254: U1.60@76.75,31.4 76.75,27.05 83.7,20.1 108.403,20.1 113.5,25.197 113.5,34.7 114.4,35.6 U2.1@115.575,35.6 119,35.6 119.7,34.9 122.9,34.9 127.4,39.4 127.4,56.5 128.1,57.2 133.2,57.2 133.8,57.8 133.8,62.213 LCD.2@132.427,63.586
FSMC_A7: U1.63 U2.2 | length 57
  Top Layer w0.254: U1.63@78.25,31.4 78.25,26.2 83.85,20.6 108.195,20.6 113,25.405 113,35 114.4,36.4 U2.2@115.575,36.4
FSMC_A8: U1.64 U2.3 | length 56.4
  Top Layer w0.254: U1.64@78.75,31.4 78.75,26.407 84.057,21.1 107.988,21.1 112.5,25.612 112.5,35.3 114.4,37.2 U2.3@115.575,37.2
FSMC_A9: U1.65 U2.4 | length 55.7
  Top Layer w0.254: U1.65@79.25,31.4 79.25,26.614 84.264,21.6 107.781,21.6 112,25.819 112,35.6 114.4,38 U2.4@115.575,38
FSMC_A10: U1.66 U2.5 | length 55.1
  Top Layer w0.254: U1.66@79.75,31.4 79.75,26.822 84.472,22.1 107.574,22.1 111.5,26.026 111.5,35.9 114.4,38.8 U2.5@115.575,38.8
FSMC_A11: U1.67 U2.42 | length 61.6
  Top Layer w0.254: U1.67@80.25,31.4 80.25,27.029 84.679,22.6 107.367,22.6 111,26.233 111,37.4 111.2,37.6 v1(111.2,38.3) ; v1@102.6,37.2 U2.42@104.425,37.2
  Bottom Layer w0.254: v1(102.7,37.2) 103.2,37.2 104.5,38.5 110.5,38.5 110.7,38.3 v1(111.2,38.3)
FSMC_A12: U1.106 U2.44 | length 19.9
  Top Layer w0.254: U1.106@92.6,41.75 96.006,41.75 96.6,42.344 v1(96.6,42.7) ; v1(100.7,43.4) 100.4,43.1 100.4,37.4 102.2,35.6 U2.44@104.425,35.6
  Bottom Layer w0.254: v1(96.6,42.7) 100,42.7 v1(100.7,43.4)
FSMC_A13: U1.107 U2.43 | length 17.9
  Top Layer w0.254: U1.107@92.6,42.25 95.65,42.25 v1(95.8,42.4) v1@95.875,42.4 ; v1@100.9,42.6 101.1,42.4 101.1,37.5 102.2,36.4 U2.43@104.425,36.4
  Bottom Layer w0.254: v1(95.8,42.4) 96.1,42.1 100.6,42.1 v1(101.1,42.6)
FSMC_A14: U1.108 U2.25 | length 15.8
  Top Layer w0.254: U1.108@92.6,42.75 95.225,42.75 97.116,44.641 97.116,45.516 102.497,50.897 104.328,50.897 U2.25@104.425,50.8
FSMC_A15: U1.109 U2.24 | length 15.8
  Top Layer w0.254: U1.109@92.6,43.25 95.15,43.25 96.71,44.81 96.71,45.684 102.625,51.6 U2.24@104.425,51.6
FSMC_A16: U1.99 U2.28 | length 18.4
  Top Layer w0.254: U1.99@92.6,38.25 95.726,38.25 98.081,40.605 98.081,43.705 98.335,43.959 98.335,44.935 101.8,48.4 U2.28@104.425,48.4
FSMC_A17: U1.100 U2.27 | length 18.6
  Top Layer w0.254: U1.100@92.6,38.75 95.651,38.75 97.674,40.773 97.674,43.873 97.929,44.128 97.929,45.129 102,49.2 U2.27@104.425,49.2
FSMC_A18: U1.101 U2.26 | length 18.7
  Top Layer w0.254: U1.101@92.6,39.25 95.576,39.25 97.268,40.942 97.268,44.042 97.522,44.296 97.522,45.322 102.2,50 U2.26@104.425,50
FSMC_D0: LCD.6 U1.104 U2.15 | length 48.6
  Top Layer w0.254: U1.104@92.6,40.75 94,40.75 94.25,40.5 95.6,40.5 v1(96.6,41.5) ; v1(111.6,46.2) 111.5,46.2 112.1,46.8 U2.15@115.575,46.8 v1(120.6,46.8)
  Bottom Layer w0.254: v1(96.6,41.5) 100.9,41.5 105.406,46.006 111.306,46.006 111.5,46.2 v1(111.6,46.2) ; v1(120.6,46.8) 121.2,47.4 121.2,48.4 128.6,55.8 128.6,56.5 129.3,57.2 131.121,57.2 LCD.6@132.427,58.506
FSMC_D1: LCD.7 U1.105 U2.14 | length 44.6
  Top Layer w0.254: U1.105@92.6,41.25 94.8,41.25 v1(94.8,41.1) ; v1(112.4,46.2) 115.375,46.2 U2.14@115.575,46 v1(120.6,46)
  Bottom Layer w0.254: v1(94.8,41.1) 95,40.9 101.1,40.9 105.8,45.6 111.844,45.6 112.197,45.953 112.197,45.997 v1(112.4,46.2) ; v1(120.6,46) 120.8,46 121.8,47 121.8,48.2 129.6,56 LCD.7@129.853,56
FSMC_D2: LCD.8 U1.142 U2.13 | length 61
  Top Layer w0.254: U1.142@86.25,56.6 86.25,50.65 v1(88.6,48.3) ; v1(109.5,48.7) 109.5,48.6 110.7,47.4 110.7,45.756 111.256,45.2 U2.13@115.575,45.2 116.8,45.2 116.999,45.399 v1(121.113,45.399)
  Bottom Layer w0.254: v1(88.6,48.3) 88.8,48.5 108.7,48.5 108.9,48.7 v1(109.5,48.7) ; v1(121.113,45.399) 121.757,46.043 121.757,46.232 122.4,46.875 122.4,48 129.1,54.7 131.161,54.7 LCD.8@132.427,55.966
FSMC_D3: LCD.9 U1.143 U2.16 | length 57
  Top Layer w0.254: U1.143@85.75,56.6 85.75,50.35 88,48.1 v1(88,47.7) ; v1(109.8,50.4) 111.1,50.4 113.9,47.6 U2.16@115.575,47.6 v1(123.1,47.6)
  Bottom Layer w0.254: v1@87.9,47.8 v1(88,47.7) 88,48.544 88.485,49.03 99.952,49.03 101.322,50.4 v1(109.8,50.4) ; v1(123.1,47.6) 128.926,53.426 LCD.9@129.887,53.426
FSMC_D4: LCD.10 U1.68 U2.7 | length 80
  Top Layer w0.254: U1.68@80.75,31.4 80.75,27.236 84.886,23.1 107.16,23.1 110.5,26.44 110.5,39.1 111.8,40.4 U2.7@115.575,40.4 121.1,40.4 123.1,42.4 v1(123.1,46.6)
  Bottom Layer w0.254: v1(123.1,46.6) 128.7,52.2 131.201,52.2 LCD.10@132.427,53.426
FSMC_D5: LCD.11 U1.69 U2.8 | length 74.8
  Top Layer w0.254: U1.69@81.25,31.4 81.25,27.443 85.093,23.6 106.953,23.6 110,26.647 110,39.3 111.9,41.2 U2.8@115.575,41.2 121,41.2 122.5,42.7 v1(122.5,45.9)
  Bottom Layer w0.254: v1(122.5,45.9) 123.4,45.9 128.386,50.886 LCD.11@129.887,50.886
FSMC_D6: LCD.12 U1.70 U2.9 | length 75.8
  Top Layer w0.254: U1.70@81.75,31.4 81.75,27.64 85.328,24.062 106.762,24.062 109.5,26.8 109.5,39.5 112,42 U2.9@115.575,42 120.9,42 121.9,43 v1(121.9,45.2)
  Bottom Layer w0.254: v1(121.9,45.2) 123.6,45.2 128,49.6 131.141,49.6 LCD.12@132.427,50.886
FSMC_D7: LCD.13 U1.73 U2.10 | length 70.6
  Top Layer w0.254: U1.73@83.25,31.4 83.25,26.714 85.496,24.468 106.504,24.468 109,26.964 109,39.7 112.1,42.8 U2.10@115.575,42.8 116.881,42.8 117.181,42.5 120.5,42.5 121.3,43.3 v1(121.3,44.5)
  Bottom Layer w0.254: v1(121.3,44.5) 123.8,44.5 127.646,48.346 LCD.13@129.887,48.346
FSMC_D8: LCD.14 U1.74 U2.32 | length 80.7
  Top Layer w0.254: U1.74@83.75,31.4 83.75,26.922 85.797,24.874 106.203,24.874 108.5,27.172 108.5,42.7 v1(108.4,42.7) 108.4,42.8 107.8,43.4 107.4,43.4 105.6,45.2 U2.32@104.425,45.2 ; v1(120,39.5) 121.1,39.5 v1(123.6,42)
  Bottom Layer w0.254: v1(108.4,42.7) 108.6,42.5 117,42.5 v1(120,39.5) ; v1(123.6,42) 128.7,47.1 131.181,47.1 LCD.14@132.427,48.346
FSMC_D9: LCD.15 U1.75 U2.35 | length 76.6
  Top Layer w0.254: U1.75@84.25,31.4 84.25,27.129 86.098,25.281 105.902,25.281 108,27.379 108,42.1 107.3,42.8 v1(106,42.8) U2.35@104.425,42.8 ; v1(120.6,38.9) 121.4,38.9 v1(123.6,41.1)
  Bottom Layer w0.254: v1(106,42.8) 106.8,42.8 107.581,42.019 116.581,42.019 119.7,38.9 v1(120.6,38.9) ; v1(123.6,41.1) 128.306,45.806 LCD.15@129.887,45.806
FSMC_D10: LCD.16 U1.76 U2.36 | length 76.5
  Top Layer w0.254: U1.76@84.75,31.4 84.75,27.336 86.399,25.687 105.601,25.687 107.5,27.586 107.5,41.5 107,42 U2.36@104.425,42 ; v1(120,38.3) 121.7,38.3 v1(124.5,41.1)
  Bottom Layer w0.254: v1(106,42) 107.025,42 107.412,41.613 116.087,41.613 119.4,38.3 v1(120,38.3) ; v1(124.5,41.1) 127.9,44.5 131.121,44.5 LCD.16@132.427,45.806
FSMC_D11: LCD.17 U1.77 U2.37 | length 70.3
  Top Layer w0.254: U1.77@85.25,31.4 85.25,27.543 86.699,26.094 105.301,26.094 107,27.793 107,40.8 106.6,41.2 U2.37@104.425,41.2 ; v1(120.6,37.7) 122,37.7 v1(124.5,40.2)
  Bottom Layer w0.254: v1(106,41.2) 107.701,41.2 107.707,41.206 115.594,41.206 119.1,37.7 v1(120.6,37.7) ; v1(124.5,40.2) 127.566,43.266 LCD.17@129.887,43.266
FSMC_D12: LCD.18 U1.78 U2.38 | length 70.7
  Top Layer w0.254: U1.78@85.75,31.4 85.75,27.75 87,26.5 105,26.5 106.5,28 106.5,40.1 106.2,40.4 U2.38@104.425,40.4 ; v1(120,37.1) 120,37 120.1,37.1 122.3,37.1 v1(125.4,40.2)
  Bottom Layer w0.254: v1(106,40.4) 107.476,40.4 107.876,40.8 115.1,40.8 118.8,37.1 v1(120,37.1) ; v1@125.4,40.2 127.2,42 131.161,42 LCD.18@132.427,43.266
FSMC_D13: LCD.19 U1.96 U2.31 | length 49.6
  Top Layer w0.254: U1.96@92.6,36.75 95.95,36.75 99.3,40.1 99.3,43.2 99.554,43.454 99.554,44.354 101.2,46 U2.31@104.425,46 105.6,46 107.7,43.9 108.2,43.9 108.997,43.103 v1(109.11,43.103) ; v1(127.4,36.9) 127.4,38.239 LCD.19@129.887,40.726
  Bottom Layer w0.254: v1(109.11,43.103) 109.214,43 117.4,43 123.5,36.9 v1(127.4,36.9)
FSMC_D14: LCD.20 U1.97 U2.30 | length 51.7
  Top Layer w0.254: U1.97@92.6,37.25 95.875,37.25 98.894,40.268 98.894,43.368 99.148,43.623 99.148,44.548 101.4,46.8 U2.30@104.425,46.8 105.6,46.8 108,44.4 108.658,44.4 109.458,43.6 v1(109.8,43.6) ; v1(128,37.5) 128,38.1 129.4,39.5 131.201,39.5 LCD.20@132.427,40.726
  Bottom Layer w0.254: v1(109.8,43.6) 109.906,43.494 117.532,43.494 123.525,37.5 v1(128,37.5)
FSMC_D15: LCD.21 U1.98 U2.29 | length 47.6
  Top Layer w0.254: U1.98@92.6,37.75 95.801,37.75 98.487,40.437 98.487,43.537 98.742,43.791 98.742,44.742 101.6,47.6 U2.29@104.425,47.6 105.6,47.6 108.3,44.9 109,44.9 109.7,44.2 v1(110.4,44.2)
  Bottom Layer w0.254: v1(110.4,44.2) 110.7,43.9 117.7,43.9 123.414,38.186 LCD.21@129.887,38.186
FSMC_NBL0: U1.169 U2.39 | length 50.2
  Top Layer w0.254: v1(70.9,41.8) 71.506,42.406 71.506,51.632 72.75,52.875 U1.169@72.75,56.6 ; v1(102.7,39.6) U2.39@104.425,39.6
  Bottom Layer w0.254: v1(70.9,41.8) 71.5,41.8 73.9,39.4 101.8,39.4 102,39.6 v1(102.7,39.6)
FSMC_NBL1: U1.170 U2.40 | length 51.3
  Top Layer w0.254: v1(70.3,41.2) 70.3,42.1 71.1,42.9 71.1,51.8 72.25,52.95 U1.170@72.25,56.6 ; v1(102.7,38.8) U2.40@104.425,38.8
  Bottom Layer w0.254: v1(70.3,41.2) 71.4,41.2 73.65,38.95 101.85,38.95 102,38.8 v1(102.7,38.8)
FSMC_NE3: U1.153 U2.6 | length 47.8
  Top Layer w0.254: U1.153@80.75,56.6 80.75,54.15 83.2,51.7 83.2,50.3 88.197,45.303 88.197,40.097 v1(88.1,40) ; v1(112,39.5) 112.1,39.6 U2.6@115.575,39.6
  Bottom Layer w0.254: v1(88.1,40) 89.5,40 89.667,39.833 101.658,39.833 102.022,40.197 102.947,40.197 102.972,40.172 103,40.2 103.7,39.5 v1(112,39.5)
FSMC_NE4: LCD.1 U1.155 | length 62.4
  Top Layer w0.254: U1.155@79.75,56.6 79.75,55.25 80.2,54.8 80.2,54 82.6,51.6 v1(82.6,51.2) ; v1(113.9,53.3) 124.1,53.3 124.9,54.1 124.9,58.599 LCD.1@129.887,63.586
  Bottom Layer w0.254: v1(82.6,51.2) 83.2,51.2 84.281,52.281 98.605,52.281 100.553,54.229 112.371,54.229 113.3,53.3 v1(113.9,53.3)
FSMC_NOE: LCD.4 U1.146 U2.41 | length 87.6
  Top Layer w0.254: U1.146@84.25,56.6 84.25,51.075 87.3,48.025 87.3,46.9 88.7,45.5 88.7,40.344 88.697,40.341 88.697,39.659 88.7,39.656 88.7,38.8 v1(89.2,38.3) ; v1(102.7,38) U2.41@104.425,38 ; v1(120.6,36.4) 122.5,36.4 126,39.9 126,57.5 128.3,59.8 131.181,59.8 LCD.4@132.427,61.046
  Bottom Layer w0.254: v1(89.2,38.3) 90.1,38.3 90.3,38.5 101.725,38.5 102.225,38 v1(102.7,38) 103.3,38 104.3,39 111.6,39 111.8,38.8 116.3,38.8 118.7,36.4 v1(120.6,36.4)
FSMC_NWE: LCD.3 U1.147 U2.17 | length 65.8
  Top Layer w0.254: U1.147@83.75,56.6 83.75,50.65 85.8,48.6 ; 85.8,48.6 v1(86.6,47.8) ; v1(110.5,51) 111.2,51 113.8,48.4 U2.17@115.575,48.4 124.1,48.4 125.4,49.7 125.4,58.1 128.346,61.046 LCD.3@129.887,61.046
  Bottom Layer w0.254: v1(86.6,47.8) 88.236,49.436 99.783,49.436 101.347,51 v1(110.5,51)

## Text inside footprints (layer, text, board x,y; h text height)
ADC1: Top Overlay "2" at 88.647,92.93 h1.52; Top Overlay "1" at 89.079,90.416 h1.52
BT1: Top Overlay "+" at 39.923,54.57 h1.15 r270
DAC1: Top Overlay "2" at 46.647,92.93 h1.52; Top Overlay "1" at 47.079,90.416 h1.52
DDS1: Top Overlay "2" at 31.647,81.93 h1.52; Top Overlay "1" at 32.079,79.416 h1.52
JLINK1: Top Overlay "2" at 142.57,40.147 h1.52 r90; Top Overlay "1" at 145.084,40.579 h1.52 r90
"Key Board1": Top Overlay "1" at 145.084,16.079 h1.52 r90; Top Overlay "2" at 142.57,15.647 h1.52 r90